# EAGLE board robotrev2 (EAGLE 7.1.0)
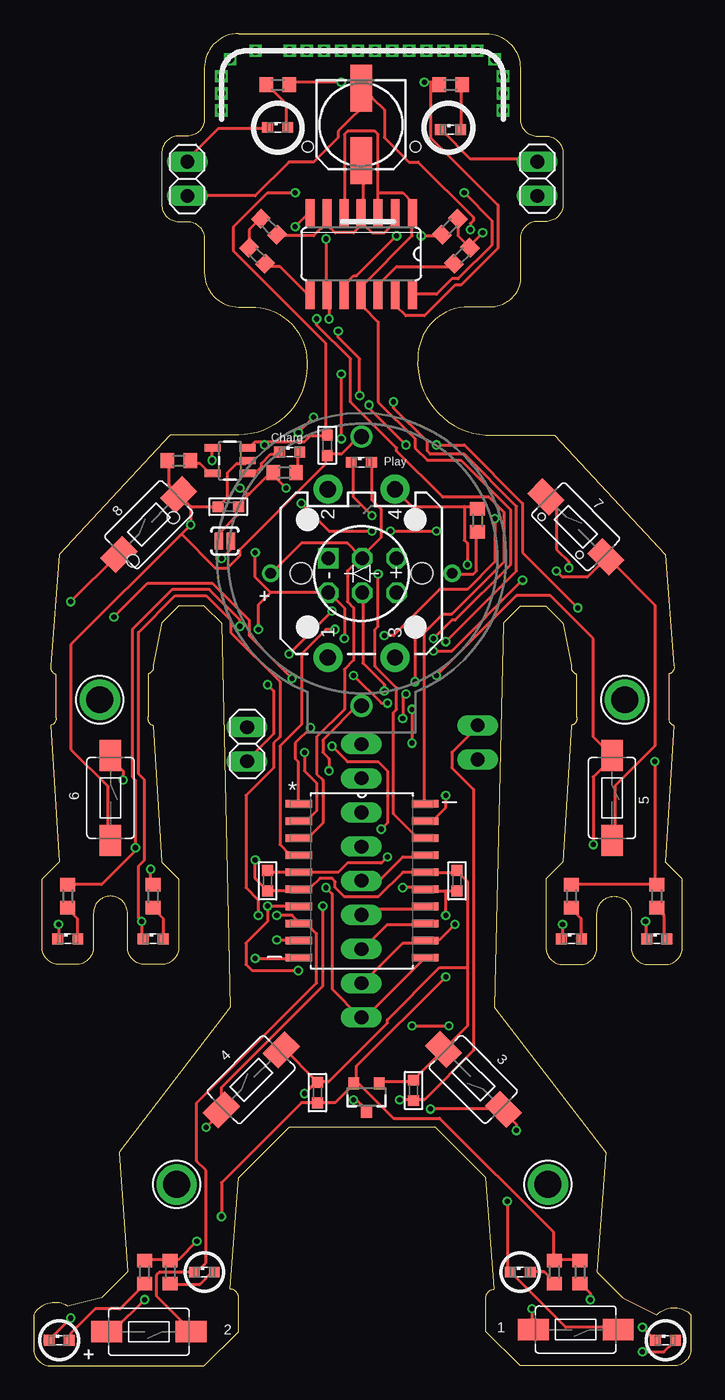
[diagram p0: board, top side]
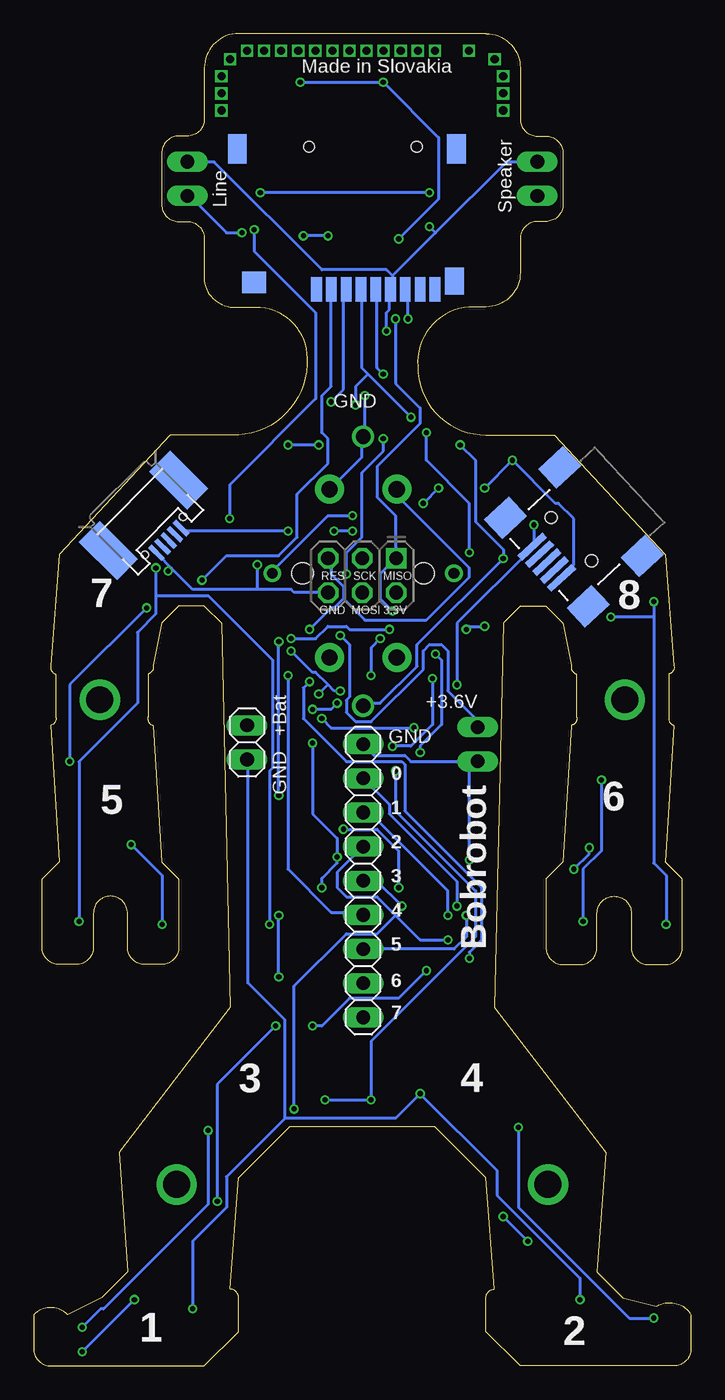
[diagram p1: board, bottom side, seen from below]

Size 48.9 x 99.06 mm. Coordinates in mm from the lower left corner, seen from the top.
Outline: 33.66,99.06 arc-90 36.2,96.52 36.2,92.71 arc90 37.47,91.44 38.1,91.44 arc-90 39.37,90.17 39.37,86.36 arc-90 38.1,85.09 37.47,85.09 arc90 36.2,83.82 36.2,81.28 arc-90 34.29,78.74 32.39,78.74 arc90 28.58,74.93 arc90 33.66,69.22 38.73,69.22 46.99,60.32 47.62,52.07 arc-90 47.24,51.44 47.24,48.26 arc90 47.62,47.62 46.99,37.46 48.26,36.2 48.26,31.12 arc-90 46.99,29.84 45.72,29.84 arc-90 44.45,31.12 44.45,33.66 arc90 43.18,34.92 arc90 41.91,33.66 41.91,31.12 arc-90 40.64,29.84 39.37,29.84 arc-90 38.1,31.12 38.1,36.2 39.37,37.46 40.01,47.62 arc90 40.39,48.26 40.39,51.44 arc-90 40.01,52.07 39.37,55.24 38.1,56.52 36.2,56.52 34.93,55.24 34.29,26.67 42.55,15.88 41.91,6.98 43.82,5.08 46.36,3.81 arc-90 48.9,3.81 48.9,1.27 arc-90 47.62,0 36.2,0 33.66,2.54 33.66,5.08 arc-90 34.29,5.71 33.66,13.97 29.84,17.78 19.05,17.78 15.24,13.97 14.6,5.71 arc-90 15.24,5.08 15.24,2.54 12.7,0 1.27,0 arc-90 0,1.27 0,3.81 arc-90 2.54,4.45 5.08,5.08 6.99,6.98 6.35,15.88 14.6,26.67 13.97,55.24 12.7,56.52 10.79,56.52 9.53,55.24 8.89,52.07 arc-90 8.51,51.44 8.51,48.26 arc90 8.89,47.62 9.53,37.46 10.79,36.2 10.79,31.12 arc-90 9.53,29.84 8.26,29.84 arc-90 6.99,31.12 6.99,33.66 arc90 5.71,34.92 arc90 4.45,33.66 4.45,31.12 arc-90 3.18,29.84 1.91,29.84 arc-90 0.64,31.12 0.64,36.2 1.91,37.46 1.27,47.62 arc90 1.65,48.26 1.65,51.44 arc-90 1.27,52.07 1.91,60.32 10.16,69.22 15.24,69.22 arc90 20.32,74.29 arc90 16.51,78.74 15.24,78.74 arc-90 12.7,81.28 12.7,83.82 arc90 11.43,85.09 10.79,85.09 arc-90 9.53,86.36 9.53,90.17 arc-90 10.79,91.44 11.43,91.44 arc90 12.7,92.71 12.7,96.52 arc-90 15.24,99.06 33.66,99.06
Copper layers (1*16): Top 0.035mm / dielectric 1.5mm / Bottom 0.035mm
Design rules "ITEADstudio_DRC *": minimum track width 6mil, minimum drill 12mil, track to track 6mil, track to pad 6mil, pad to pad 6mil, via to via 6mil, smd to smd 0mil, copper to edge 20mil, drill to drill 8mil, minimum pad ring 10mil, minimum via ring 6mil, stop-mask expansion 2mil, vias tented up to drill 100mil, thermal gap 10mil
Net classes: 0 default: width 0.229 mm, drill 0.381 mm, clearance 0.229 mm; 1 GND: width 0.229 mm, drill 0.381 mm, clearance 0.229 mm; 2 pwr: width 0.229 mm, drill 0.381 mm, clearance 0.229 mm

## Footprints (pad centres in the part's own frame; a part is rotated, then mirrored left to right if it is on the bottom)
TACTILE-SWITCH-1101NE = smd 2.3 x 1.6: P$1 -3.15,0; P$2 3.15,0
SOT23 = smd 0.8 x 0.9: 1 -0.95,-1; 2 0.95,-1; 3 0,1.1
BATTCOM_20MM_PTH = drill 1.1: + 20,0; - 0,0
SJ_2S-NO = smd 0.635 x 1.27: 1 -0.45,0; 2 0.45,0
C0603 = smd 0.8 x 0.8: 1 -0.762,0; 2 0.762,0
153CLV-0605 = smd 3.5 x 1.6: + 2.7,0; - -2.7,0
SML0603 = smd 0.8 x 0.8: A 0.75,0; C -0.75,0
SO14 = smd 0.66 x 2.032: 1 -3.81,-3.073; 2 -2.54,-3.073; 3 -1.27,-3.073; 4 0,-3.073; 5 1.27,-3.073; 6 2.54,-3.073; 7 3.81,-3.073; 8 3.81,3.073; 9 2.54,3.073; 10 1.27,3.073; 11 0,3.073; 12 -1.27,3.073; 13 -2.54,3.073; 14 -3.81,3.073
SOT23-5 = smd 0.55 x 1.2: 1 -0.95,-1.3; 2 0,-1.3; 3 0.95,-1.3; 4 0.95,1.3; 5 -0.95,1.3
1X02 = drill 1.016 long: 1 -1.27,0; 2 1.27,0
1X09 = drill 1.016 long: 1 -10.16,0; 2 -7.62,0; 3 -5.08,0; 4 -2.54,0; 5 0,0; 6 2.54,0; 7 5.08,0; 8 7.62,0; 9 10.16,0
R0603 = smd 1 x 1.1: 1 -0.85,0; 2 0.85,0
TACTILE-PTH-LED-12MM = drill 1.2 pad 2.159: 1 -6.25,2.5; 2 6.25,2.5; 3 -6.25,-2.5; 4 6.25,-2.5 | drill 0.8: A 0,6.75; C 0,-6.75 | hole 1.6: 0,4.5; 0,-4.5
SOIC127P1032X265-20N = smd 1.981 x 0.559: 1 -4.699,5.715; 2 -4.699,4.445; 3 -4.699,3.175; 4 -4.699,1.905; 5 -4.699,0.635; 6 -4.699,-0.635; 7 -4.699,-1.905; 8 -4.699,-3.175; 9 -4.699,-4.445; 10 -4.699,-5.715; 11 4.699,-5.715; 12 4.699,-4.445; 13 4.699,-3.175; 14 4.699,-1.905; 15 4.699,-0.635; 16 4.699,0.635; 17 4.699,1.905; 18 4.699,3.175; 19 4.699,4.445; 20 4.699,5.715
2X3-NS = drill 1.016 square: 1 -2.54,-1.27 | drill 1.016 octagon: 2 -2.54,1.27; 3 0,-1.27; 4 0,1.27; 5 2.54,-1.27; 6 2.54,1.27
MOUNTINGHOLE_2.0_PLATED = drill 2 pad 3: P$1 0,0
MICROSD_PP = smd 1.8 x 0.8: 1 0,3.85; 2 0,2.75; 3 0,1.65; 4 0,0.55; 5 0,-0.55; 6 0,-1.65; 7 0,-2.75; 8 0,-3.85; 9 0,-4.95 | smd 1.6 x 1.8: GND@1 0.5,8.5 | smd 2.2 x 1.4: GND@2 10.45,9.75; GND@4 10.45,-6.55 | smd 2 x 1.4: GND@3 0.6,-6.4 | hole 0.8: 10.6,4.4; 10.6,-3.6
USB-MICROB_LARGEPAD = smd 0.35 x 1.4: D+ 0,2.65; D- -0.65,2.65; GND 1.3,2.65; ID 0.65,2.65; VBUS -1.3,2.65 | smd 2.2 x 4: MT1 -3.7,0; MT2 3.7,0 | hole 0.55: -2,2.15; 2,2.15
USB-MINIB = smd 2.5 x 0.5: D+ 2.5,0; D- 2.5,0.8; GND 2.5,-1.6; ID 2.5,-0.8; VBUS 2.5,1.6 | smd 2.5 x 2: MTN1 -3,4.5; MTN2 2.5,4.5; MTN3 -3,-4.5; MTN4 2.5,-4.5 | hole 0.9: 0,2.2; 0,-2.2

## Placement (x,y rotation side)
1  [TACTILE-SWITCH-1101NE]  40.32,2.7 180 top
2  [TACTILE-SWITCH-1101NE]  8.57,2.54 180 top
3  [TACTILE-SWITCH-1101NE]  32.7,21.3 135 top
3V3  3V3  [SOT23]  24.77,20 180 top
4  [TACTILE-SWITCH-1101NE]  16.19,21.27 45 top
5  [TACTILE-SWITCH-1101NE]  43.02,42.23 270 top
6  [TACTILE-SWITCH-1101NE]  5.71,42.23 270 top
7  [TACTILE-SWITCH-1101NE]  40.32,62.39 315 top
8  [TACTILE-SWITCH-1101NE]  8.57,62.55 45 top
BATTERY  [BATTCOM_20MM_PTH]  24.38,69.09 270 top
BATTERYENABLE  SOLDERJUMPERNO  [SJ_2S-NO]  14.22,61.34 180 top
C1  10uF  [C0603]  14.48,63.88 180 top
C2  100  [153CLV-0605]  24.35,92.3 270 top
C3  10uF  [C0603]  21.84,68.45 270 top
C4  100n  [C0603]  28.26,20.48 90 top
C5  100n  [C0603]  21.11,20.32 270 top
C6  100n  [C0603]  31.5,36.07 270 top
C7  100n  [C0603]  17.4,36.07 90 top
CHARGER  [SML0603]  19.05,67.94 0 top
IC1  74HCT14D  [SO14]  24.36,82.68 180 top
IC2  MCP73831  [SOT23-5]  14.6,67.31 90 top
JP1  [1X02]  33.02,46.35 270 bottom
JP2  [1X02]  15.88,46.23 270 top
JP3  [1X09]  24.38,36.07 270 bottom
JP5  [1X02]  11.43,88.26 90 top
JP6  [1X02]  37.47,88.26 270 top
L1  [SML0603]  36.2,6.98 0 top
L2  [SML0603]  12.7,6.98 0 top
L3  [SML0603]  46.99,1.9 0 top
L4  [SML0603]  1.91,1.9 0 top
L5  [SML0603]  40.01,31.75 0 top
L6  [SML0603]  8.89,31.75 0 top
L7  [SML0603]  46.36,31.75 0 top
L8  [SML0603]  2.54,31.75 0 top
LEDCH  1k  [R0603]  18.67,66.42 180 top
PB1  [SML0603]  31.02,91.92 0 top
PB3  [SML0603]  18.16,92.07 0 top
PLAY2  [SML0603]  24.38,67.18 0 top
R1  1k  [R0603]  33.02,62.87 270 top
R2  1k  [R0603]  31.02,95.25 180 top
R3  1k  [R0603]  38.73,6.98 90 top
R4  1k  [R0603]  18.16,95.25 0 top
R5  1k  [R0603]  10.16,6.98 90 top
R6  256k  [R0603]  31.85,82.55 45 top
R7  1k  [R0603]  40.64,6.98 90 top
R8  1k  [R0603]  8.26,6.98 90 top
R9  1k  [R0603]  40.01,34.92 90 top
R10  1k  [R0603]  8.89,34.92 90 top
R11  1k  [R0603]  46.36,34.92 90 top
R12  1k  [R0603]  2.54,34.92 90 top
R13  1k  [R0603]  30.96,84.71 45 top
R14  200  [R0603]  16.61,82.55 135 top
R15  56  [R0603]  17.5,84.71 315 top
RPROG  22K  [R0603]  10.79,67.31 0 top
S1  SWITCH-MOMENTARY-LEDPTH  [TACTILE-PTH-LED-12MM]  24.38,58.93 90 top
U1  ATTINY861A-SU  [SOIC127P1032X265-20N]  24.42,36.07 0 top
U$1  AVR_SPI_PRG_6NS  [2X3-NS]  24.45,58.77 180 bottom
U$3  MOUNTINGHOLE2.0  [MOUNTINGHOLE_2.0_PLATED]  43.97,49.53 0 top
U$4  MOUNTINGHOLE2.0  [MOUNTINGHOLE_2.0_PLATED]  4.92,49.53 0 top
U$6  MOUNTINGHOLE2.0  [MOUNTINGHOLE_2.0_PLATED]  10.64,13.49 0 top
U$7  MOUNTINGHOLE2.0  [MOUNTINGHOLE_2.0_PLATED]  38.26,13.49 0 top
U$9  MICROSD_PP  [MICROSD_PP]  24,80.05 90 bottom
USB1  USB-MICROBLARGEPAD  [USB-MICROB_LARGEPAD]  40.72,63.25 225 bottom
X5  USBSMD  [USB-MINIB]  8.89,61.47 223 bottom

## Library data of the parts
1-8 BATTERYENABLE U$1 X5 = SparkFun
3V3 = okie
BATTERY = es
C1 C3-C7 = rc-master-smd
C2 R1-R15 = resistor
CHARGER L1-L8 PB1 PB3 PLAY2 = led
IC1 = 74xx-eu
IC2 = SparkFunNew
JP1-JP3 JP5 JP6 = pinhead
LEDCH RPROG = rcl
S1 = Local Library
U1 = Atmel_By_element14_Batch_1-00; MPN: ATTINY861A-SU; OC_FARNELL: 1841628; OC_NEWARK: 12T1344; PACKAGE: SOIC-20; SUPPLIER: Atmel
U$3 U$4 U$6 U$7 = microbuilder
U$9 = DE1594-v2
USB1 = zak

## Nets
1: 1.P$1 JP3.2 L1.C U1.7
2: 2.P$1 JP3.3 L2.C U1.8
4: 3.P$1 JP3.4 L3.C U1.9
8: 4.P$1 JP3.5 L4.C U1.17
16: 5.P$1 JP3.6 L5.C U1.14
32: 6.P$1 JP3.7 L6.C U1.13
64: 7.P$1 JP3.8 L7.C U1.12
128: 8.P$1 JP3.9 L8.C U1.11
CS: U1.1 U$1.4 U$9.2
GND: 1.P$2 2.P$2 3.P$2 3V3.1 4.P$2 5.P$2 6.P$2 7.P$2 8.P$2 BATTERY.- C1.2 C3.2 C4.2 C5.1 C6.1 C7.1 IC1.7 IC2.2 JP1.2 JP2.2 JP3.1 JP5.2 JP6.1 PB1.C PB3.C R1.1 RPROG.1 S1.4 U1.6 U1.16 U$1.6 U$9.6 USB1.GND X5.GND
LED: PLAY2.A S1.A U1.3 U$1.3
LED0X: PB1.A R2.1
LED1X: PB3.A R4.1
LINE: JP6.2 R6.2 R13.2
MISO: U1.19 U$9.3
MOSI: U1.20 U$9.7
N$1: PLAY2.C R1.2 S1.C
N$12: IC1.8 R14.1
N$13: C2.+ IC1.2 IC1.4 IC1.6 R15.2
N$14: C2.- JP2.1 JP5.1
N$15: IC1.12 R6.1
N$16: IC1.10 R13.1
N$17: R14.2 R15.1
N$18: CHARGER.C IC2.1
N$31: IC2.5 RPROG.2
N$35: CHARGER.A LEDCH.1
PB1: IC1.9 IC1.13 R2.2 R4.2 U1.2 U$1.1
PB3: IC1.1 IC1.3 IC1.5 IC1.11 U1.4
RES: S1.2 U1.10 U$1.5
SCK: U1.18 U$9.5
VBAT: 3V3.3 BATTERY.+ BATTERYENABLE.1 C3.1 C4.1 IC1.14 IC2.3 JP1.1
VBUS: BATTERYENABLE.2 C1.1 IC2.4 LEDCH.2 USB1.VBUS X5.VBUS
VCC: 3V3.2 C5.2 C6.2 C7.2 R3.2 R5.2 R7.2 R8.2 R9.2 R10.2 R11.2 R12.2 U1.5 U1.15 U$1.2 U$9.4
X1: L1.A R3.1
X2: L2.A R5.1
X3: L3.A R7.1
X4: L4.A R8.1
X5: L5.A R9.1
X6: L6.A R10.1
X7: L7.A R11.1
X8: L8.A R12.1

## Tracks (layer width: path | path; a pad name or v marks a point on that pad's centre or on a via)
1  (via drill 0.38)
  Top 0.229: 1.P$1 43.46,2.87 39.57,2.87 35.46,6.98 L1.C 35.23,6.98 v35.23,12.24 | U1.7 19.69,34.19 v17.4,34.19 17.4,33.05 15.8,31.45 15.8,29.84 16.26,29.39 v19.69,29.39 | v28.14,25.27 v30.89,25.27
  Bottom 0.229: v17.4,34.19 17.4,36.02 22.43,41.05 22.43,41.73 JP3.2 | v35.23,12.24 35.23,20.93 v30.89,25.27 | v28.14,25.27 27.46,25.27 25.4,27.33 21.74,27.33 v19.69,29.39
2  (via drill 0.38)
  Top 0.229: 2.P$1 11.68,2.64 9.17,5.16 9.17,6.76 9.4,6.98 L2.C 12.14,6.98 12.83,7.67 12.83,14.53 12.14,15.21 12.14,19.56 21.06,28.47 21.06,32.13 20.37,32.82 19.91,32.82 U1.8 19.69,33.05 19.23,33.5 v18.09,33.5
  Bottom 0.229: v18.09,33.5 18.09,35.33 23.8,41.05 24.26,41.05 JP3.3
4  (via drill 0.38)
  Top 0.229: v18.09,31.67 19.69,31.67 U1.9 | v45.29,2.87 46.2,1.96 L3.C | v35.92,17.5 35.92,17.96 35,18.87 3.P$1 34.77,19.1 v29.52,19.1
  Bottom 0.229: v18.09,31.67 20.14,31.67 21.97,33.5 | 21.97,33.5 23.34,34.87 25.63,34.87 26.31,35.56 26.31,36.7 24.49,38.53 JP3.4 | v45.29,2.87 43.92,4.24 43.69,4.24 35.92,12.01 v35.92,17.5 | 21.97,33.5 23.34,32.13 25.63,32.13 29.52,28.24 v29.52,19.1
8  (via drill 0.38)
  Top 0.229: U1.17 29.06,37.85 27.46,37.85 25.86,36.25 24.49,36.25 JP3.5 | v2.77,3.56 1.17,1.96 L4.C | v12.83,17.73 13.97,18.87 4.P$1 13.97,19.1 13.97,20.7 21.51,28.24 v21.51,34.19
  Bottom 0.229: v2.77,3.56 4.6,3.56 12.83,11.79 v12.83,17.73 | v21.51,34.19 23.34,36.02 24.26,36.02 JP3.5
16  (via drill 0.38)
  Top 0.229: U1.14 29.06,33.96 24.71,33.96 24.49,33.73 JP3.6 | v39.34,32.82 39.34,31.9 L5.C | v41.63,38.76 41.63,43.79 43,45.16 5.P$1 43,45.39 41.63,46.76 41.63,54.08 38.43,57.28 35.92,57.28 v29.97,51.33
  Bottom 0.229: v39.34,32.82 39.34,36.47 v41.63,38.76 | v29.97,51.33 29.97,36.93 26.77,33.73 24.49,33.73 JP3.6
32  (via drill 0.38)
  Top 0.229: U1.13 29.06,32.82 26.31,32.82 24.49,30.99 JP3.7 | v6.66,43.56 6.66,44.25 5.74,45.16 6.P$1 | L6.C 8.03,31.9 v8.03,33.05 7.8,33.27 7.8,37.16 8.26,37.62 8.26,43.56 7.8,44.02 7.8,54.53 10.54,57.28 12.83,57.28 14.66,55.45 14.66,54.53 18.31,50.88 18.31,46.76 17.86,46.3 17.86,44.48 15.8,42.42 15.8,35.56 16.71,34.65 v16.71,33.5
  Bottom 0.229: v8.03,33.05 8.03,36.93 6.66,38.3 v6.66,43.56 | JP3.7 17.63,30.99 16.71,31.9 v16.71,33.5
64  (via drill 0.38)
  Top 0.229: JP3.8 24.49,28.47 27.46,31.45 29.06,31.45 U1.12 29.29,31.67 30.2,31.67 v31.34,32.82 | v45.52,33.05 45.52,31.9 L7.C | v39.8,59.33 39.8,59.79 38.89,60.71 38.89,63.91 38.2,64.59 7.P$1
  Bottom 0.229: v45.52,33.05 45.52,44.93 41.17,49.28 41.17,54.53 39.8,55.91 39.8,57.28 | v39.8,59.33 39.8,57.28 | v31.34,32.82 31.34,44.25 31.12,44.48 31.12,52.48 35.92,57.28 39.8,57.28
128  (via drill 0.38)
  Top 0.229: U1.11 29.06,30.3 24.49,25.73 JP3.9 24.26,25.96 22.2,28.02 22.2,35.1 v21.74,35.56 | v1.85,32.82 1.85,31.9 L8.C | v2.77,56.82 6.2,60.25 8.P$1 | v25.86,39.9 26.31,40.36 26.31,44.25 25.63,44.93 23.34,44.93 v22.2,46.08 | v19.23,51.1 16.03,54.3 16.03,55.45 13.28,58.19 8.48,58.19 v5.97,55.68
  Bottom 0.229: v1.85,32.82 1.85,36.47 2.77,37.39 2.77,55.68 | v2.77,56.82 2.77,55.68 | v21.74,35.56 21.74,38.3 23.34,39.9 v25.86,39.9 | v22.2,46.08 20.83,46.08 19.23,47.68 v19.23,51.1 | 2.77,55.68 v5.97,55.68
CS  (via drill 0.38)
  Top 0.229: v36.37,58.42 31.12,53.16 v29.74,53.16 | v26.09,50.19 26.09,50.65 24.49,52.25 24.49,57.28 U$1.4 | v20.6,47.45 19.46,46.3 19.46,45.16 19.69,44.93 19.69,41.96 U1.1 | v27.46,48.13 27.46,49.73 v27.69,49.96
  Bottom 0.229: v36.37,58.42 34.54,60.25 30.66,60.25 29.29,61.62 29.29,64.82 27,67.11 27,68.94 27.46,69.39 27.46,72.14 26.77,72.82 26.77,79.91 U$9.2 | v29.74,53.16 28.14,51.56 27.91,51.56 27,50.65 | 27,50.65 26.54,50.19 v26.09,50.19 | v20.6,47.45 26.77,47.45 v27.46,48.13 | 27,50.65 v27.69,49.96
GND  (via drill 0.38)
  Top 0.229: 3V3.1 25.86,21.16 28.14,21.16 C4.2 28.37,21.39 30.43,23.44 3.P$2 30.66,23.67 32.26,25.27 32.26,29.62 | 17.4,35.33 19.69,35.33 U1.6 19.91,35.56 20.6,35.56 21.29,36.25 22.2,36.25 22.43,36.02 22.43,35.56 23.11,34.87 25.63,34.87 27.46,36.7 U1.16 31.34,36.7 C6.1 31.57,36.7 32.26,36.02 32.26,29.62 | v16.48,37.62 16.48,36.25 17.4,35.33 | 17.4,35.33 C7.1 | 21.06,21.16 18.54,23.67 4.P$2 | v8.26,4.93 5.97,2.64 5.51,2.64 2.P$2 | 21.06,21.16 v20.14,20.24 | 21.06,21.16 C5.1 21.29,21.16 21.97,21.16 26.31,25.5 26.31,25.73 30.2,29.62 32.26,29.62 | v37.06,4.24 37.06,2.87 1.P$2 | 5.P$2 43.23,39.22 43.23,43.1 46.2,46.08 46.2,56.59 42.77,60.02 7.P$2 42.55,60.02 41.17,58.65 39.34,58.65 v38.89,59.11 | PB1.C 30.43,91.8 32.49,89.74 37.29,89.74 JP6.1 | PB3.C 17.4,92.02 13.74,92.02 11.46,89.74 JP5.2 | v19.46,84.71 20.37,85.62 IC1.7 | BATTERY.- 24.26,69.16 22.88,67.79 21.97,67.79 C3.2 21.74,67.56 21.74,67.11 15.34,60.71 15.34,60.25 14.43,59.33 13.51,59.33 11,61.85 | 32.03,63.91 28.14,63.91 27,65.05 S1.4 | 32.03,63.91 32.94,63.91 R1.1 | 11.68,63.91 13.51,63.91 C1.2 14.43,64.59 14.43,66.42 15.11,67.11 15.8,67.11 IC2.2 | 11.68,63.91 11,64.59 8.P$2 10.77,64.82 10.08,65.51 10.08,67.11 RPROG.1 | 11,61.85 v11.68,62.54 11.68,63.91 | 11,61.85 2.77,53.62 2.77,45.85 5.51,43.1 5.51,39.22 6.P$2 | v22.66,76.94 22.66,76.48 24.26,74.88 v24.26,72.14 | v32.26,59.56 32.26,61.16 32.03,61.39 32.03,63.91 | v17.4,50.65 17.86,50.19 17.86,46.99 16.03,45.16 JP2.2
  Bottom 0.229: 16.48,44.93 20.83,44.93 21.29,45.39 23.57,45.39 24.26,46.08 JP3.1 | 16.48,44.93 16.03,44.93 JP2.2 16.48,44.93 | v16.48,37.62 16.48,44.93 | v8.26,4.93 8.26,6.53 14.43,12.7 14.43,14.53 v20.14,20.24 21.97,18.41 30.2,18.41 | v37.06,4.24 37.06,9.27 34.54,11.79 34.54,14.07 30.2,18.41 | 30.2,18.41 30.2,25.73 32.94,28.47 32.94,44.93 JP1.2 | 38.66,59.33 37.06,57.73 32.26,57.73 | 38.66,59.33 39.57,60.25 USB1.GND | 32.26,57.73 29.74,57.73 29.52,57.51 27,57.51 U$1.6 | v38.89,59.11 38.66,59.33 | 22.2,81.05 22.2,80.14 U$9.6 22.43,79.91 22.43,78.54 22.66,78.31 v22.66,76.94 | 19,84.25 13.74,89.51 11.46,89.51 JP5.2 | 19,84.25 22.2,81.05 | 19,84.25 v19.46,84.71 | 22.2,81.05 22.66,81.51 27.46,81.51 35.46,89.51 37.29,89.51 JP6.1 | S1.4 26.77,65.28 24.49,67.56 24.49,68.94 BATTERY.- 24.26,69.16 v24.26,72.14 | v11.68,62.54 11.68,60.93 X5.GND 11.91,60.71 17.4,55.22 v17.4,50.65 | v32.26,59.56 32.26,57.73
LED
  Top 0.229: PLAY2.A 25.17,67.11 25.17,64.36 25.86,63.68 25.86,61.62 24.49,60.25 U$1.3 | U1.3 19.91,39.45 20.6,39.45 21.51,40.36 21.51,43.56 21.06,44.02 21.06,46.76 23.11,48.82 23.11,51.79 23.8,52.48 23.8,56.36 23.34,56.82 23.34,59.11 24.26,60.02 U$1.3 | S1.A 17.86,59.11 19.91,61.16 23.34,61.16 24.26,60.25 U$1.3
LED0X
  Top 0.229: PB1.A 31.8,92.02 31.8,95.22 R2.1
LED1X
  Top 0.229: PB3.A 18.77,92.25 18.77,93.85 17.4,95.22 R4.1
LINE  (via drill 0.38)
  Top 0.229: R13.2 31.57,85.17 31.57,84.02 32.26,83.34 R6.2 32.49,83.34 v33.4,84.25
  Bottom 0.229: v33.4,84.25 34.54,84.25 37.29,87 JP6.2
MISO  (via drill 0.38)
  Top 0.229: v26.77,71.68 26.77,71.22 29.29,68.71 29.29,68.02 29.52,67.79 32.03,67.79 35.92,63.91 35.92,59.11 v30.66,53.85 | v30.66,42.42 30.66,41.5 29.74,40.59 29.29,40.59 U1.19
  Bottom 0.229: v26.77,71.68 25.86,72.59 25.86,79.91 U$9.3 | v30.66,42.42 v30.66,53.85
MOSI  (via drill 0.38)
  Top 0.229: v21.06,77.85 21.06,77.39 23.57,74.88 23.57,71.68 27,68.25 27,68.02 30.43,64.59 33.86,64.59 35,63.45 35,59.79 31.12,55.91 30.43,55.91 29.06,54.53 29.06,41.96 U1.20
  Bottom 0.229: v21.06,77.85 21.06,79.91 U$9.7
N$1  (via drill 0.38)
  Top 0.229: v25.17,63.22 23.8,64.59 23.8,67.11 PLAY2.C | R1.2 32.94,61.85 32.94,59.11 32.72,58.88 31.34,58.88 S1.C
  Bottom 0.229: v25.17,63.22 27,63.22 31.12,59.11 S1.C
N$2  (via drill 0.6)
  other vias: 16.51,97.79
N$4  (via drill 0.6)
  other vias: 19.05,97.79
N$5  (via drill 0.6)
  other vias: 20.32,97.79
N$6  (via drill 0.6)
  other vias: 21.59,97.79
N$7  (via drill 0.6)
  other vias: 22.86,97.79
N$8  (via drill 0.6)
  other vias: 24.13,97.79
N$9  (via drill 0.6)
  other vias: 25.4,97.79
N$10  (via drill 0.6)
  other vias: 26.67,97.79
N$11  (via drill 0.6)
  other vias: 27.94,97.79
N$12
  Top 0.229: R14.1 17.4,81.74 18.31,81.74 20.37,79.68 IC1.8
N$13
  Top 0.229: 21.74,84.94 20.83,84.02 18.31,84.02 R15.2 | 21.74,84.94 21.74,85.62 IC1.6 21.74,84.94 | IC1.4 24.49,85.85 24.49,89.51 C2.+ | 24.49,84.94 25.17,84.25 26.09,84.25 26.77,84.94 26.77,85.62 IC1.2 | 24.49,84.94 24.49,85.62 IC1.4 | 21.74,84.94 22.43,84.25 23.8,84.25 24.49,84.94 | 24.49,84.94 IC1.4
N$14  (via drill 0.38)
  Top 0.229: v26.09,54.3 26.77,54.3 30.2,57.73 32.26,57.73 34.32,59.79 v34.32,62.99 | v32.49,84.48 32.49,84.94 32.72,85.17 32.72,85.4 28.6,89.51 27.91,89.51 26.09,91.34 26.09,93.4 25.17,94.31 | 25.17,94.31 24.49,95 C2.- | JP5.1 16.48,87 19,89.51 20.83,89.51 22.66,91.34 22.66,91.8 25.17,94.31
  Bottom 0.229: v26.09,54.3 25.4,53.62 25.4,49.73 25.63,49.51 25.63,48.59 24.94,47.9 23.8,47.9 19.91,51.79 19.91,53.16 19.46,53.62 18.54,53.62 18.09,53.16 18.09,50.19 16.03,48.13 16.03,47.68 JP2.1 | v34.32,62.99 34.32,65.51 27.91,71.91 27.91,78.31 32.49,82.88 v32.49,84.48
N$15
  Top 0.229: IC1.12 25.63,80.37 27,81.74 31.12,81.74 R6.1
N$16  (via drill 0.38)
  Top 0.229: v28.83,84.02 30.2,84.02 R13.1 | v27,84.02 24.03,81.05 23.8,81.05 23.11,80.37 23.11,79.68 IC1.10
  Bottom 0.229: v27,84.02 v28.83,84.02
N$17
  Top 0.229: R14.2 16.03,83.34 16.03,84.48 16.71,85.17 R15.1
N$18
  Top 0.229: CHARGER.C 18.09,67.79 17.63,67.79 16.94,67.11 16.94,66.88 16.48,66.42 16.03,66.42 IC2.1
N$19  (via drill 0.6)
  other vias: 29.21,97.79
N$20  (via drill 0.6)
  other vias: 30.48,97.79
N$21  (via drill 0.6)
  other vias: 31.75,97.79
N$22  (via drill 0.6)
  other vias: 33.02,97.79
N$23  (via drill 0.6)
  other vias: 34.29,97.16
N$24  (via drill 0.6)
  other vias: 34.93,95.88
N$25  (via drill 0.6)
  other vias: 34.93,94.62
N$26  (via drill 0.6)
  other vias: 34.93,93.34
N$27  (via drill 0.6)
  other vias: 14.6,97.16
N$28  (via drill 0.6)
  other vias: 13.97,95.88
N$29  (via drill 0.6)
  other vias: 13.97,94.62
N$30  (via drill 0.6)
  other vias: 13.97,93.34
N$31
  Top 0.229: RPROG.2 11.68,67.11 12.37,67.11 13.28,66.19 IC2.5
N$35
  Top 0.229: CHARGER.A 19.69,67.79 19.69,66.42 LEDCH.1
PB1  (via drill 0.38)
  Top 0.229: v20.14,45.62 20.14,44.25 21.06,43.33 21.06,41.27 20.37,40.59 19.91,40.59 U1.2 | v22.2,56.13 v19,52.93 | v22.88,95.45 19.23,95.45 R4.2 | 29.52,95.45 29.97,95.45 R2.2 | 29.52,95.45 v29.06,95.45 | v21.74,83.79 21.74,79.68 IC1.9 21.97,79.45 v21.97,77.85 | 29.52,95.45 29.52,91.34 34.54,86.31 34.54,83.11 31.8,80.37 31.34,80.37 29.06,78.08 27.69,78.08 27,78.76 27,79.45 IC1.13
  Bottom 0.229: v20.14,45.62 20.14,46.08 18.54,47.68 18.54,52.48 v19,52.93 | v22.2,56.13 23.11,57.05 23.11,58.88 21.97,60.02 U$1.1 21.97,60.25 21.97,63.22 23.34,64.59 23.34,66.88 20.14,70.08 20.14,71.22 21.97,73.05 v21.97,77.85 | v29.06,95.45 v22.88,95.45 18.77,91.34 18.77,86.77 v21.74,83.79
PB3  (via drill 0.38)
  Top 0.229: IC1.3 25.63,87.22 | 25.63,87.22 25.63,91.57 25.4,91.8 23.34,91.8 23.11,91.57 23.11,85.85 IC1.5 | 25.63,87.22 27.46,87.22 28.14,86.54 28.14,85.85 IC1.1 28.14,85.62 28.14,84.02 24.49,80.37 24.49,79.68 IC1.11 24.49,79.45 24.49,78.76 25.63,77.62 25.63,71.68 28.37,68.94 28.37,68.25 29.29,67.34 31.8,67.34 35.46,63.68 35.46,59.56 31.34,55.45 31.12,55.45 v29.74,54.08 | v22.43,54.76 21.74,54.76 19.91,52.93 19.91,47.68 18.31,46.08 18.31,38.76 19,38.08 19.69,38.08 U1.4
  Bottom 0.229: v22.43,54.76 25.4,54.76 25.63,54.99 27,54.99 27.91,54.08 v29.74,54.08
RES  (via drill 0.38)
  Top 0.229: v16.48,30.3 19.69,30.3 U1.10 | v28.37,54.76 v28.37,50.88
  Bottom 0.229: v16.48,30.3 16.48,30.76 15.57,31.67 15.57,35.56 21.29,41.27 21.29,44.7 21.51,44.93 25.63,44.93 28.83,48.13 28.83,50.42 v28.37,50.88 | v28.37,54.76 26.77,56.36 26.54,56.36 25.86,57.05 | 25.86,57.05 25.86,57.96 26.77,58.88 26.77,60.02 U$1.5 | 25.86,57.05 24.26,55.45 19.69,55.45 16.48,58.65 16.48,59.33 21.74,64.59 21.74,65.05 S1.2
SCK  (via drill 0.38)
  Top 0.229: v22.88,68.94 v22.88,73.74 | v25.63,58.88 25.63,54.99 25.4,54.76 25.4,52.02 27,50.42 27,48.82 26.77,48.59 26.77,41.05 28.37,39.45 29.06,39.45 U1.18
  Bottom 0.229: v22.88,73.74 23.34,74.19 23.34,79.91 U$9.5 | v22.88,68.94 22.88,68.02 24.49,66.42 24.49,61.62 25.63,60.48 v25.63,58.88
VBAT  (via drill 0.38)
  Top 0.229: JP1.1 32.94,47.45 31.12,45.62 31.12,44.48 32.72,42.88 32.72,23.44 29.06,19.79 28.37,19.79 C4.1 28.14,19.79 v27.23,19.79 | v23.8,19.79 24.03,19.79 24.71,19.1 3V3.3 | v13.97,60.02 14.66,60.71 14.66,61.16 BATTERYENABLE.1 | 17.17,68.71 16.48,68.71 16.03,68.25 IC2.3 | 17.17,68.71 20.14,68.71 20.6,69.16 21.74,69.16 C3.1 21.74,69.39 21.74,76.02 14.88,82.88 14.88,84.71 17.4,87.22 v19.46,87.22 | v32.03,87.22 34.09,85.17 34.09,83.34 31.57,80.82 31.12,80.82 29.97,79.68 28.37,79.68 IC1.14 | 17.17,68.71 v17.17,68.48 | v21.97,44.25 21.97,45.16 21.51,45.62 21.51,46.53 24.26,49.28 BATTERY.+
  Bottom 0.229: v27.23,19.79 v23.8,19.79 23.8,24.13 16.03,31.9 16.03,35.33 21.97,41.27 v21.97,44.25 | BATTERY.+ 24.26,49.28 23.11,49.28 20.37,52.02 20.37,53.62 v13.97,60.02 13.97,60.71 16.03,62.76 16.03,67.34 v17.17,68.48 | v19.46,87.22 v32.03,87.22
VBUS  (via drill 0.38)
  Top 0.229: v13.28,67.34 13.28,68.25 IC2.4 | BATTERYENABLE.2 13.97,61.39 13.97,62.08 15.11,63.22 15.11,63.68 C1.1 15.11,63.91 16.03,64.82 | 16.03,64.82 17.63,66.42 | v26.54,62.08 v29.97,62.08 | v25.17,62.08 21.97,62.08 v19.91,64.13 | 17.63,66.42 v18.77,65.28 | 17.63,66.42 LEDCH.2 | v15.34,65.28 15.8,64.82 16.03,64.82
  Bottom 0.229: X5.VBUS 9.63,58.65 8.71,59.56 8.71,62.99 9.86,64.13 10.08,64.13 v13.28,67.34 v15.34,65.28 | v29.97,62.08 37.74,62.08 USB1.VBUS | v25.17,62.08 v26.54,62.08 | v18.77,65.28 v19.91,64.13
VCC  (via drill 0.38)
  Top 0.229: C7.2 17.4,36.7 U1.5 22.66,36.7 23.34,37.39 25.86,37.39 v26.31,37.85 | 30.66,35.33 29.29,35.33 U1.15 29.06,35.56 v27.46,35.56 | 30.66,35.33 31.34,35.33 C6.2 | R7.2 40.49,7.9 38.89,7.9 R3.2 38.66,7.9 38.66,9.96 30.2,18.41 26.77,18.41 24.03,21.16 | R8.2 8.26,7.9 10.08,7.9 R5.2 10.31,7.9 10.77,7.9 v12.14,9.27 | v13.97,11.1 13.97,13.61 19.91,19.56 C5.2 22.43,19.56 23.8,20.93 3V3.2 24.03,21.16 | v30.66,33.5 30.66,35.33 | v30.66,28.93 24.03,22.3 24.03,21.16 | v8.71,36.93 8.71,35.79 R10.2 | R12.2 2.54,35.79 5.05,35.79 7.57,38.3 v7.57,38.53 7.57,43.56 7.34,43.79 7.34,54.76 10.31,57.73 13.06,57.73 15.34,55.45 v15.34,54.99 | 46.2,35.79 40.03,35.79 R9.2 | v19.69,69.39 v20.83,70.54 | v16.48,60.48 16.48,58.65 17.63,57.51 | 17.63,57.51 21.74,57.51 U$1.2 21.97,57.51 23.11,56.36 v23.11,54.08 | v46.2,44.93 46.2,35.79 | v40.49,56.36 36.37,60.48 36.37,64.13 32.03,68.48 v29.97,68.48 | v27.69,68.48 24.94,71.22 v24.94,71.45 | 46.2,35.79 R11.2 | v16.71,54.76 16.71,56.59 17.63,57.51 | v28.14,48.82 v28.14,46.3 | v26.31,49.28 25.86,49.28 v23.8,51.33
  Bottom 0.229: v27.46,35.56 27.46,36.25 26.31,37.39 v26.31,37.85 26.31,39.22 28.14,41.05 v28.14,46.3 | v13.97,11.1 v12.14,9.27 | v30.66,28.93 v30.66,33.5 | v7.57,38.53 7.57,38.08 v8.71,36.93 | v20.83,70.54 24.03,73.74 | 24.03,73.74 24.49,74.19 24.49,79.91 U$9.4 | v19.69,69.39 19.69,67.34 16.48,64.13 v16.48,60.48 | v46.2,44.93 46.2,50.65 v40.49,56.36 | v27.69,68.48 v29.97,68.48 | v24.94,71.45 24.94,72.82 24.03,73.74 | v15.34,54.99 16.48,54.99 v16.71,54.76 | v28.14,48.82 26.77,48.82 v26.31,49.28 | v23.8,51.33 23.8,53.39 v23.11,54.08
X1
  Top 0.229: L1.A 37.97,6.98 38.66,6.3 R3.1
X2
  Top 0.229: L2.A 13.28,6.98 12.37,6.07 10.31,6.07 R5.1
X3  (via drill 0.38)
  Top 0.229: v45.29,1.04 46.89,1.04 47.57,1.73 L3.A | v41.4,4.93 41.4,5.38 40.72,6.07 R7.1
  Bottom 0.229: v41.4,4.93 v45.29,1.04
X4
  Top 0.229: L4.A 2.77,1.96 2.77,2.41 4.6,4.24 6.43,4.24 8.26,6.07 R8.1
X5
  Top 0.229: L5.A 40.72,31.9 40.72,33.27 40.03,33.96 R9.1
X6
  Top 0.229: L6.A 9.63,31.9 9.63,33.27 8.94,33.96 R10.1
X7
  Top 0.229: L7.A 46.89,31.9 46.89,33.5 46.43,33.96 R11.1
X8
  Top 0.229: L8.A 3.23,31.9 3.23,33.27 2.54,33.96 R12.1

## Text on the board
tNames: Charg | Play | + | +
bNames: Made in Slovakia | Line | Speaker | GND | MISO | SCK | RES | 8 | 7 | 3.3V | MOSI | GND | +3.6V | +Bat | GND | GND | 0 | Bobrobot | 6 | 1 | 5 | 2 | 3 | 4 | 5 | 6 | 7 | 4 | 3 | 2 | 1